# EAGLE board AKLM-1.4 (EAGLE 7.7.0)
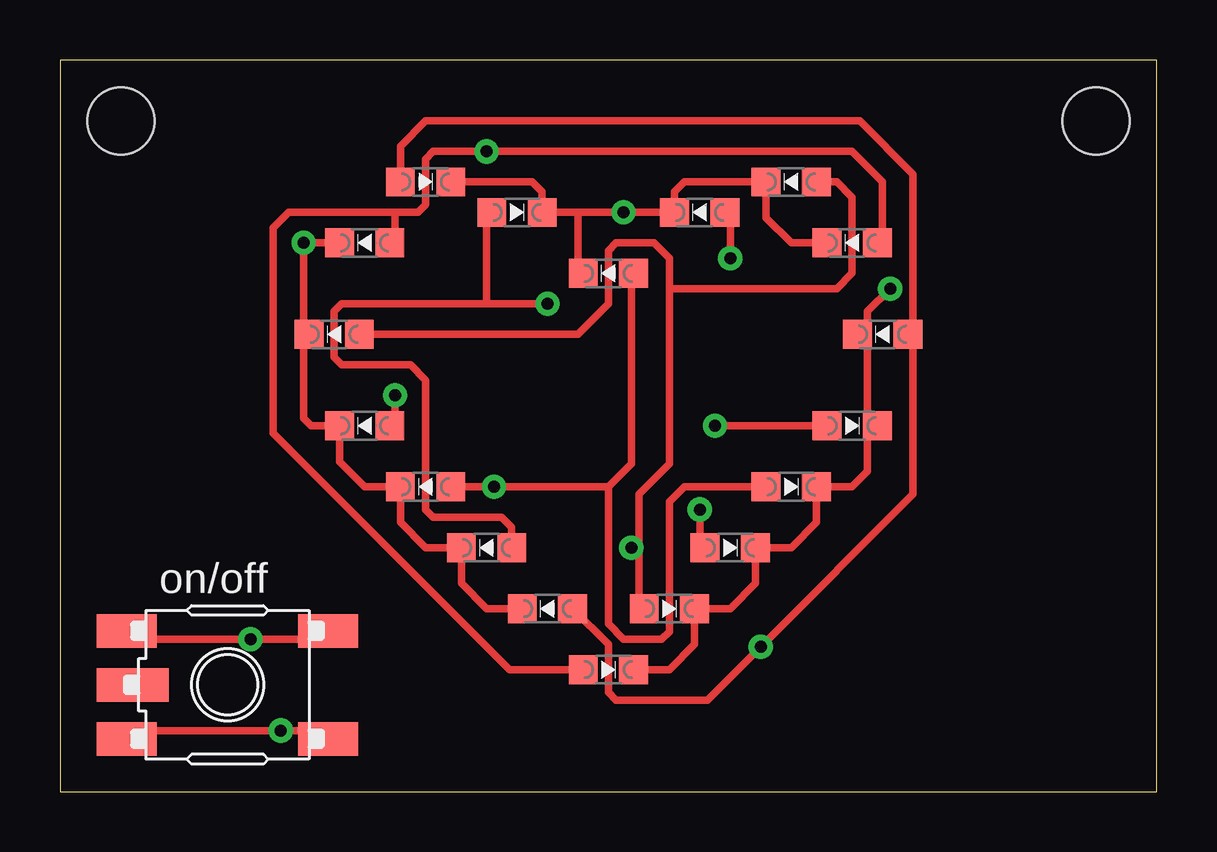
[diagram p0: board, top side]
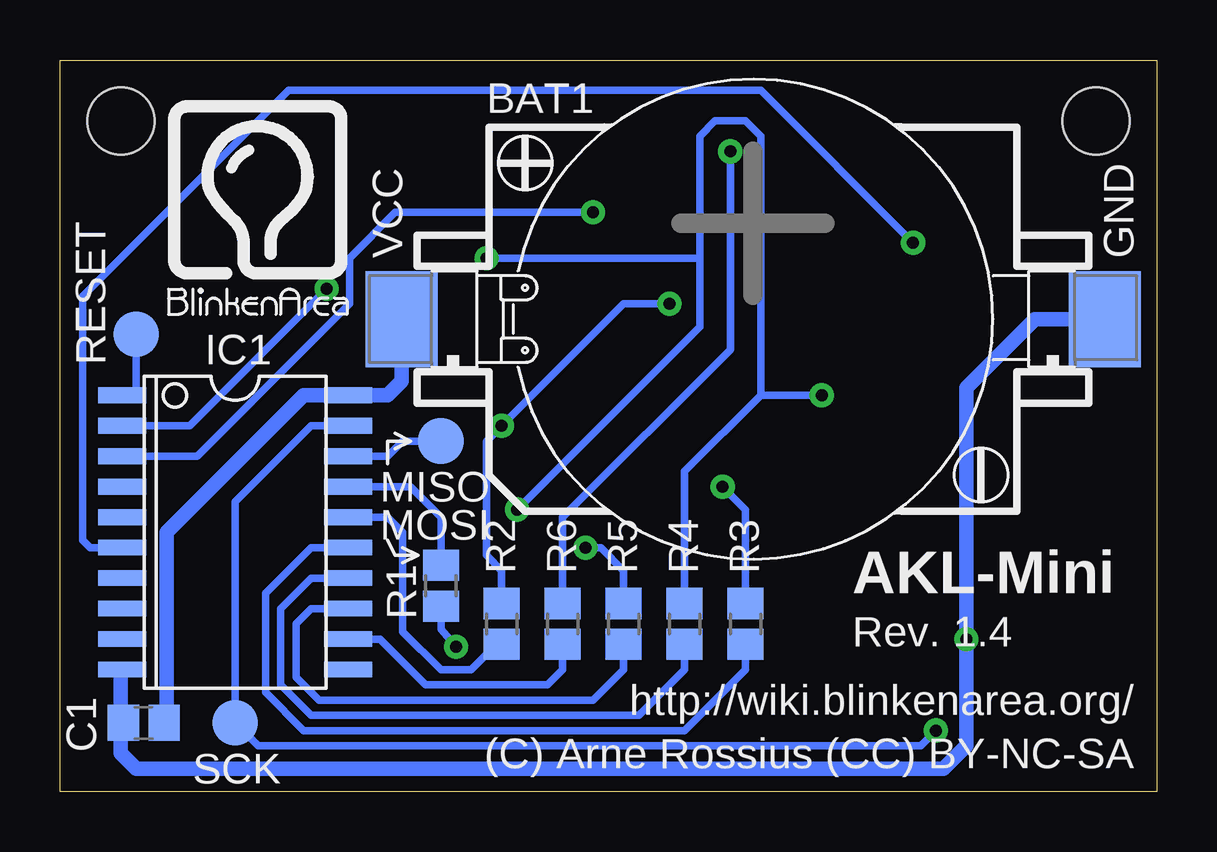
[diagram p1: board, bottom side, seen from below]

Size 45.72 x 30.48 mm. Coordinates in mm from the lower left corner, seen from the top.
Outline: 0,0 45.72,0 45.72,30.48 0,30.48 0,0
Copper layers (1*16): Top 0.035mm / dielectric 1.5mm / Bottom 0.035mm
Design rules "default": minimum track width 12mil, minimum drill 20mil, track to track 11mil, track to pad 11mil, pad to pad 11mil, via to via 11mil, smd to smd 11mil, copper to edge 15mil, drill to drill 8mil, minimum pad ring 10mil, minimum via ring 10mil, stop-mask expansion 2mil, vias tented up to drill 30mil, thermal gap 10mil
Holes 2.8 mm at 43.18,27.94 2.54,27.94

## Footprints (pad centres in the part's own frame; a part is rotated, then mirrored left to right if it is on the bottom)
KZH20SMD = smd 3 x 4: NEG -14.65,0; POS 14.65,0
C0805 = smd 1.3 x 1.5: 1 -0.85,0; 2 0.85,0
SO20W = smd 0.65 x 2: 1 -5.715,-4.7; 2 -4.445,-4.7; 3 -3.175,-4.7; 4 -1.905,-4.7; 5 -0.635,-4.7; 6 0.635,-4.7; 7 1.905,-4.7; 8 3.175,-4.7; 9 4.445,-4.7; 10 5.715,-4.7; 11 5.715,4.7; 12 4.445,4.7; 13 3.175,4.7; 14 1.905,4.7; 15 0.635,4.7; 16 -0.635,4.7; 17 -1.905,4.7; 18 -3.175,4.7; 19 -4.445,4.7; 20 -5.715,4.7
CHIPLED_0805 = smd 1.2 x 1.2: A 0,-1.05; C 0,1.05
R0805 = smd 1.3 x 1.5: 1 -0.85,0; 2 0.85,0
LSG-KEY = smd 2.5 x 1.4: A1 -4.2,2.25; A2 4.2,2.25; B1 -4.2,-2.25; B2 4.2,-2.25 | smd 3 x 1.4: HOUSING 3.95,0
SMDPAD_75MIL = smd 1.905 x 1.905: PAD 0,0

## Placement (x,y rotation side)
BAT1  KZH20SMD  [KZH20SMD]  16.83,19.68 180 bottom
C1  100n  [C0805]  42.23,2.86 180 bottom
IC1  ATTINY2313-A  [SO20W]  38.42,10.79 270 bottom
LED1  [CHIPLED_0805]  22.86,5.08 270 top
LED2  [CHIPLED_0805]  25.4,7.62 270 top
LED3  [CHIPLED_0805]  27.94,10.16 270 top
LED4  [CHIPLED_0805]  30.48,12.7 270 top
LED5  [CHIPLED_0805]  33.02,15.24 270 top
LED6  [CHIPLED_0805]  34.29,19.05 90 top
LED7  [CHIPLED_0805]  33.02,22.86 90 top
LED8  [CHIPLED_0805]  30.48,25.4 90 top
LED9  [CHIPLED_0805]  26.67,24.13 90 top
LED10  [CHIPLED_0805]  22.86,21.59 90 top
LED11  [CHIPLED_0805]  19.05,24.13 270 top
LED12  [CHIPLED_0805]  15.24,25.4 270 top
LED13  [CHIPLED_0805]  12.7,22.86 90 top
LED14  [CHIPLED_0805]  11.43,19.05 90 top
LED15  [CHIPLED_0805]  12.7,15.24 90 top
LED16  [CHIPLED_0805]  15.24,12.7 90 top
LED17  [CHIPLED_0805]  17.78,10.16 90 top
LED18  [CHIPLED_0805]  20.32,7.62 90 top
R1  47  [R0805]  29.84,8.57 270 bottom
R2  47  [R0805]  27.3,6.99 90 bottom
R3  47  [R0805]  17.14,6.99 90 bottom
R4  47  [R0805]  19.68,6.99 90 bottom
R5  47  [R0805]  22.23,6.99 90 bottom
R6  47  [R0805]  24.77,6.99 90 bottom
SW1  on/off  [LSG-KEY]  6.99,4.45 180 top
U$2  [LOGO_07.5MM]  37.47,25.08 0 bottom
X1  [SMDPAD_75MIL]  29.84,14.61 0 bottom
X2  [SMDPAD_75MIL]  42.55,19.05 0 bottom
X3  [SMDPAD_75MIL]  38.42,2.86 0 bottom

## Library data of the parts
BAT1 = battery
C1 R1-R6 = rcl
IC1 = ic-atmel
LED1-LED18 = led
SW1 = _custom
U$2 = blinkenarea
X1-X3 = con-pads

## Nets
N$1: IC1.17 R1.1
N$2: IC1.16 R2.1
N$3: IC1.15 R3.1
N$4: IC1.14 R4.1
N$5: IC1.13 R5.1
N$6: IC1.12 R6.1
N$7: LED1.A LED7.A LED13.A R6.2
N$8: LED2.A LED8.A LED14.A R5.2
N$9: LED3.A LED9.A LED15.A R4.2
N$10: LED4.A LED10.A LED16.A R3.2
N$11: LED5.A LED11.A LED17.A R2.2
N$12: LED6.A LED12.A LED18.A R1.2
N$13: IC1.2 LED1.C LED2.C LED3.C LED4.C LED5.C LED6.C
N$14: IC1.3 LED7.C LED8.C LED9.C LED10.C LED11.C LED12.C
N$15: IC1.6 LED13.C LED14.C LED15.C LED16.C LED17.C LED18.C
N$16: IC1.19 SW1.A1 SW1.A2 X3.PAD
N$17: BAT1.POS C1.1 IC1.20
N$18: BAT1.NEG C1.2 IC1.10 SW1.B1 SW1.B2
N$19: IC1.18 X1.PAD
N$20: IC1.1 X2.PAD

## Tracks (layer width: path | path; a pad name or v marks a point on that pad's centre or on a via)
N$1
  Bottom 0.305: R1.1 29.84,11.43 31.11,12.7 IC1.17
N$2
  Bottom 0.305: IC1.16 32.07,11.43 31.43,10.79 31.43,6.67 29.84,5.08 28.57,5.08 27.52,6.13 R2.1
N$3
  Bottom 0.305: R3.1 17.14,5.08 19.68,2.54 35.56,2.54 37.15,4.13 37.15,8.26 35.24,10.16 IC1.15
N$4
  Bottom 0.305: R4.1 19.68,5.08 21.59,3.17 35.24,3.17 36.51,4.45 36.51,7.62 35.24,8.89 IC1.14
N$5
  Bottom 0.305: R5.1 22.23,5.08 23.5,3.81 34.92,3.81 35.88,4.76 35.88,6.99 35.24,7.62 IC1.13
N$6
  Bottom 0.305: R6.1 24.77,5.08 25.4,4.45 30.48,4.45 32.38,6.35 IC1.12
N$7  (via drill 0.5)
  Top 0.305: LED1.A 18.73,5.08 8.89,14.92 8.89,23.5 9.53,24.13 13.97,24.13 | LED7.A 34.29,22.86 34.29,25.4 33.02,26.67 v17.78,26.67 15.56,26.67 15.24,26.35 15.24,24.45 14.92,24.13 13.97,24.13 | LED13.A 13.97,22.86 13.97,24.13
  Bottom 0.305: R6.2 24.77,11.43 17.78,18.41 v17.78,26.67
N$8  (via drill 0.5)
  Top 0.305: LED8.A 32.38,25.4 33.02,24.77 33.02,21.59 32.38,20.95 25.4,20.95 | 25.4,20.95 25.4,13.65 24.13,12.38 24.13,10.16 | LED2.A 24.13,7.62 24.13,10.16 | LED14.A 21.59,19.05 22.86,20.32 22.86,22.54 23.18,22.86 24.77,22.86 25.4,22.23 25.4,20.95 | 24.13,10.16 v23.81,10.16
  Bottom 0.305: v23.81,10.16 23.18,10.16 22.23,9.21 R5.2
N$9  (via drill 0.5)
  Top 0.305: LED3.A 26.67,10.16 v26.67,11.75 | LED9.A 27.94,24.13 v27.94,22.23 | LED15.A 13.97,15.34 v13.97,16.51
  Bottom 0.305: 16.51,16.51 v13.97,16.51 | R4.2 19.68,13.34 16.51,16.51 | 19.05,22.23 v27.94,22.23 | 19.05,22.23 19.05,27.3 18.41,27.94 17.14,27.94 16.51,27.3 16.51,16.51 | v26.67,11.75 19.05,19.37 19.05,22.23
N$10  (via drill 0.5)
  Top 0.305: LED16.A v18.1,12.7 22.86,12.7 | 22.86,12.7 23.81,13.65 23.81,21.59 LED10.A | 22.86,12.7 22.86,6.99 23.5,6.35 25.08,6.35 25.4,6.67 25.4,12.06 26.04,12.7 LED4.A
  Bottom 0.305: R3.2 17.14,11.75 v18.1,12.7
N$11  (via drill 0.5)
  Top 0.305: LED11.A 17.78,24.13 17.78,20.32 | v27.3,15.24 LED5.A | 17.78,20.32 11.75,20.32 11.43,20 11.43,18.1 11.75,17.78 14.61,17.78 15.24,17.14 15.24,11.75 15.56,11.43 18.41,11.43 18.83,11.02 LED17.A | 17.78,20.32 v20.32,20.32
  Bottom 0.305: R2.2 27.3,9.21 27.94,9.84 27.94,14.61 v27.3,15.24 22.23,20.32 v20.32,20.32
N$12  (via drill 0.5)
  Top 0.305: LED18.A 22.86,6.13 22.86,4.13 23.18,3.81 26.99,3.81 v29.21,6.03 35.56,12.38 35.56,19.05 | 35.56,19.05 LED6.A | 35.56,19.05 35.56,25.72 33.34,27.94 15.24,27.94 14.19,26.89 LED12.A
  Bottom 0.305: R1.2 29.84,6.77 v29.21,6.03
N$13  (via drill 0.5)
  Top 0.305: 33.66,15.24 33.66,19.05 | 33.66,19.05 LED6.C | 34.29,15.24 LED5.C 33.66,15.24 | LED1.C 25.4,5.08 26.45,6.13 LED2.C 27.94,7.62 28.99,8.67 LED3.C 30.48,10.16 31.53,11.21 LED4.C 33.02,12.7 33.66,13.34 33.66,15.24 | 33.66,19.05 33.66,20 v34.61,20.95
  Bottom 0.305: v34.61,20.95 40.32,15.24 IC1.2
N$14  (via drill 0.5)
  Top 0.305: LED9.C 25.4,24.13 | LED10.C 21.59,21.59 21.59,24.13 | LED9.C v23.5,24.13 21.59,24.13 | 21.59,24.13 LED11.C 20.1,24.98 19.68,25.4 LED12.C | LED7.C 30.48,22.86 29.43,23.91 LED8.C 26.04,25.4 25.62,24.98 LED9.C
  Bottom 0.305: v23.5,24.13 31.75,24.13 33.66,22.23 33.66,20.32 40.01,13.97 IC1.3
N$15  (via drill 0.5)
  Top 0.305: LED13.C v10.16,22.86 10.16,19.05 | 10.16,19.05 LED14.C | 10.16,19.05 10.16,15.56 10.48,15.24 LED15.C 11.65,13.75 12.7,12.7 LED16.C 14.19,11.21 15.24,10.16 LED17.C 16.73,8.67 17.78,7.62 LED18.C
  Bottom 0.305: v10.16,22.86 16.51,29.21 36.2,29.21 44.77,20.64 44.77,10.48 44.45,10.16 IC1.6
N$16  (via drill 0.5)
  Top 0.305: 11.43,2.54 11.43,2.19 SW1.A1 | 11.75,2.54 11.43,2.54 | SW1.A2 3.13,2.54 v9.21,2.54 11.43,2.54
  Bottom 0.305: v9.21,2.54 9.84,1.91 37.47,1.91 X3.PAD 38.42,12.06 35.24,15.24 IC1.19
N$17
  Bottom 0.61: C1.1 41.27,2.86 41.27,10.79 35.56,16.51 IC1.20 32.07,16.51 31.48,17.1 BAT1.POS
N$18  (via drill 0.5)
  Top 0.305: SW1.B1 11.19,6.35 v7.94,6.35 3.13,6.35 SW1.B2
  Bottom 0.305: 43.18,5.02 IC1.10
  Bottom 0.61: 43.18,2.86 43.18,1.59 42.55,0.95 8.89,0.95 7.94,1.91 v7.94,6.35 7.94,16.83 5.08,19.68 BAT1.NEG | 43.18,2.86 C1.2 | 43.18,2.86 43.18,5.02
N$19
  Bottom 0.305: IC1.18 32.07,13.97 31.43,14.61 X1.PAD
N$20
  Bottom 0.305: IC1.1 42.55,16.51 X2.PAD

## Text on the board
tPlace: on/off
bPlace: GND | VCC | RESET | MISO | MOSI | AKL-Mini | Rev. 1.4 | http://wiki.blinkenarea.org/ | (C) Arne Rossius (CC) BY-NC-SA | SCK
bNames: BAT1